# EAGLE board ultrasonic (EAGLE 9.6.2)
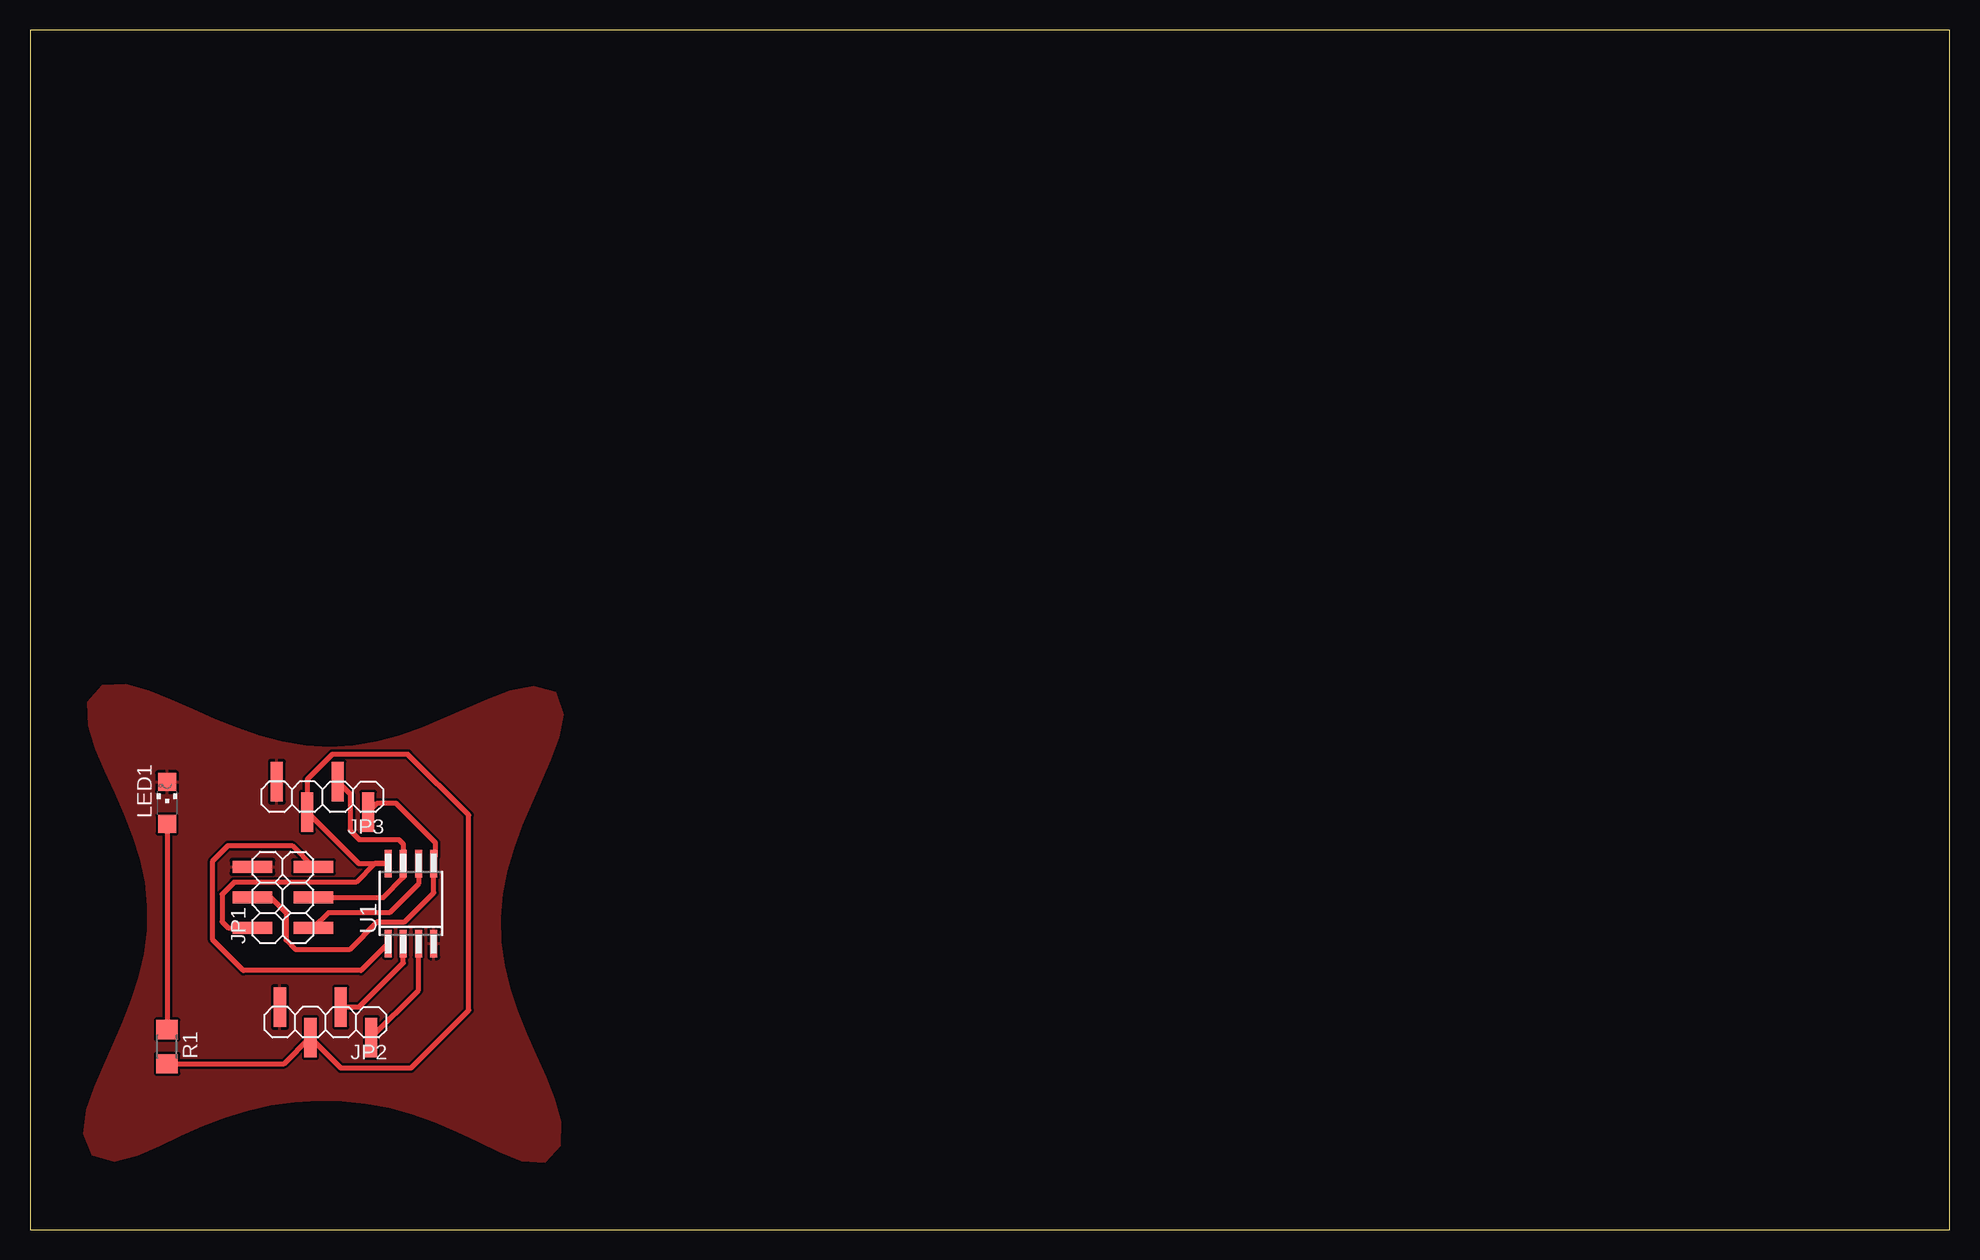
[diagram p0: board, top side]

Size 160 x 100 mm. Coordinates in mm from the lower left corner, seen from the top.
Outline: 0,0 160,0 160,100 0,100 0,0
Copper layers (1*16): Top 0.035mm / dielectric 1.5mm / Bottom 0.035mm
Design rules "default *": minimum track width 6mil, minimum drill 0.35mm, track to track 8mil, track to pad 8mil, pad to pad 8mil, via to via 8mil, smd to smd 8mil, copper to edge 40mil, drill to drill 6mil, minimum pad ring 10mil, minimum via ring 8mil, stop-mask expansion 4mil, vias tented up to drill 0mil, thermal gap 10mil

## Footprints (pad centres in the part's own frame; a part is rotated, then mirrored left to right if it is on the bottom)
2X03SMD = smd 1.016 x 3.302: 1 -1.27,-3.81; 2 -1.27,1.27; 3 1.27,-3.81; 4 1.27,1.27; 5 3.81,-3.81; 6 3.81,1.27
1X04SMD = smd 1.016 x 3.302: 1 -1.27,1.27; 2 1.27,-1.27; 3 3.81,1.27; 4 6.35,-1.27
CHIPLED_1206 = smd 1.5 x 1.5: A 0,-1.75; C 0,1.75
R1206 = smd 1.6 x 1.803: 1 -1.422,0; 2 1.422,0
SOIC8_EIAJ_208MIL = smd 0.6 x 2.286: 1 -1.905,-3.33; 2 -0.635,-3.33; 3 0.635,-3.33; 4 1.905,-3.33; 5 1.905,3.33; 6 0.635,3.33; 7 -0.635,3.33; 8 -1.905,3.33

## Placement (x,y rotation side)
JP1  [2X03SMD]  19.81,26.42 90 top
JP2  [1X04SMD]  27.18,17.27 180 top
JP3  [1X04SMD]  26.92,36.07 180 top
LED1  [CHIPLED_1206]  11.43,35.56 0 top
R1  [R1206]  11.43,15.24 270 top
U1  ATTINY45-20S  [SOIC8_EIAJ_208MIL]  31.75,27.18 0 top

## Library data of the parts
JP1-JP3 = pinhead-2
LED1 = led
R1 = rcl; SPICEPREFIX: R
U1 = _hhn_attiny25_45_85

## Nets
GND: JP1.6 JP2.4 JP3.4 LED1.C U1.4
N$1: LED1.A R1.1
N$2: JP2.1 U1.3
N$3: JP1.4 JP3.1 U1.5
N$4: JP1.1 U1.6
N$6: JP1.5 U1.1
N$7: JP1.3 JP3.2 U1.7
N$8: JP2.2 U1.2
VCC: JP1.2 JP2.3 JP3.3 R1.2 U1.8

## Tracks (layer width: path | path; a pad name or v marks a point on that pad's centre or on a via)
GND
  pour Top: 44.11,41.01 44.48,42.96 43.85,44.77 41.98,45.28 40.04,44.89 38.18,44.19 36.36,43.39 34.54,42.58 32.7,41.83 30.83,41.16 28.91,40.65 26.95,40.31 24.97,40.2 22.98,40.31 21.02,40.64 19.1,41.15 17.22,41.79 15.38,42.54 13.56,43.34 11.74,44.14 9.9,44.88 7.99,45.42 6.02,45.37 4.78,43.94 4.85,41.97 5.46,40.07 6.24,38.25 7.06,36.44 7.86,34.62 8.58,32.76 9.17,30.87 9.59,28.92 9.79,26.95 9.76,24.96 9.51,22.99 9.05,21.05 8.45,19.16 7.73,17.31 6.94,15.48 6.13,13.67 5.35,11.84 4.7,9.96 4.42,8 5.16,6.21 7.02,5.7 8.94,6.19 10.76,6.99 12.56,7.85 14.37,8.66 16.23,9.37 18.13,9.95 20.07,10.39 22.04,10.67 24.02,10.79 26.01,10.74 27.98,10.54 29.94,10.17 31.85,9.65 33.73,8.99 35.55,8.2 37.35,7.34 39.13,6.47 40.97,5.73 42.93,5.62 44.23,7 44.27,8.97 43.75,10.89 43.01,12.74 42.2,14.55 41.4,16.37 40.65,18.21 40.02,20.1 39.54,22.03 39.27,23.99 39.22,25.98 39.4,27.96 39.78,29.91 40.34,31.82 41.03,33.68 42.61,37.33 43.41,39.15
N$1
  Top 0.406: LED1.A R1.1
N$2
  Top 0.406: JP2.1 32.38,19.94 U1.3
N$3  (1 unrouted)
  Top 0.406: JP3.1 28.96,35.56 30.48,35.56 33.78,32.26 33.78,31.11 | JP1.4 20.07,27.69 21.34,26.42 21.34,24.13 22.1,23.37 26.67,23.37 28.96,25.65 31.24,25.65 33.66,28.07 U1.5
N$4
  Top 0.406: 32.48,30.48 32.45,30.51 U1.6 32.38,28.83 29.97,26.42 24.89,26.42 JP1.1
N$6
  Top 0.406: U1.1 27.59,21.59 17.78,21.59 15.24,24.13 15.24,30.73 16.51,32 21.84,32 JP1.5
N$7
  Top 0.406: JP3.2 26.67,36.32 26.67,33.27 27.43,32.51 30.73,32.51 31.11,32.13 U1.7 31.11,29.34 29.46,27.69 JP1.3
N$8
  Top 0.406: JP2.2 27.43,18.54 31.11,22.23 U1.2
VCC
  Top 0.406: 11.79,13.46 R1.2 21.18,13.82 JP2.3 25.91,13.46 31.75,13.46 36.58,18.29 36.58,34.54 31.5,39.62 25.21,39.62 23.11,37.53 JP3.3 27.4,30.51 U1.8 28.73,30.51 27.18,28.96 17.02,28.96 16,27.94 16,25.65 16.51,25.15 JP1.2 19.3,25.15